# EAGLE board breakout_rfm12b (EAGLE 5.11)
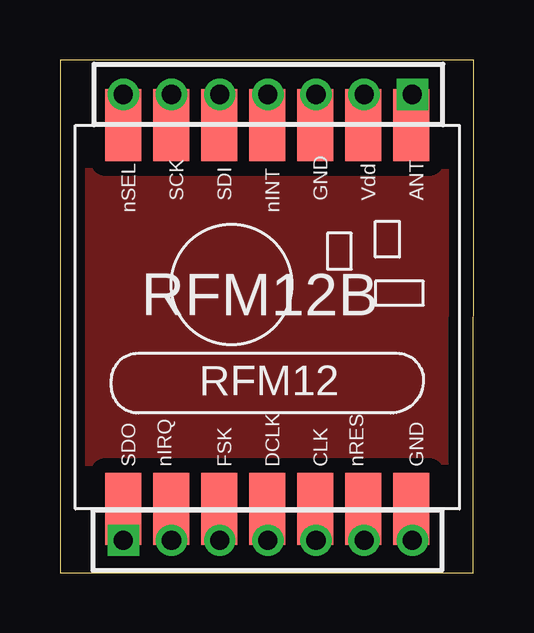
[diagram p0: board, top side]
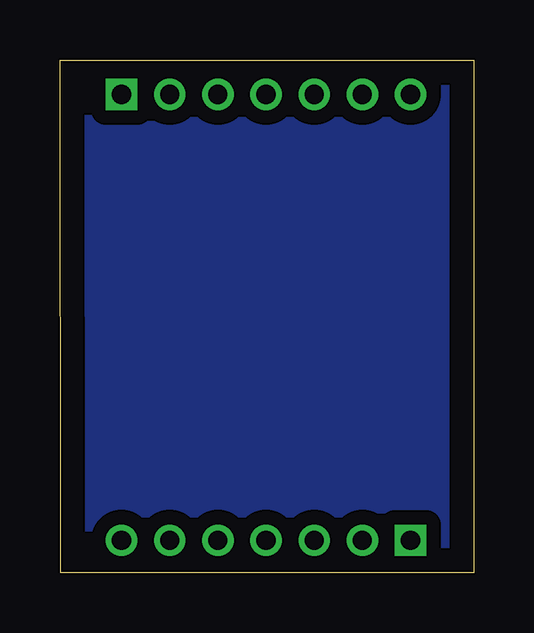
[diagram p1: board, bottom side, seen from below]

Size 17.25 x 21.38 mm. Coordinates in mm from the lower left corner, seen from the top.
Outline: 0,0 17.22,0 17.25,21.38 0,21.38 0,0
Copper layers (1*16): Top 0.035mm / dielectric 1.5mm / Bottom 0.035mm
Design rules "default": minimum track width 10mil, minimum drill 24mil, track to track 8mil, track to pad 8mil, pad to pad 8mil, via to via 8mil, smd to smd 8mil, copper to edge 40mil, drill to drill 8mil, minimum pad ring 10mil, minimum via ring 8mil, stop-mask expansion 4mil, vias tented up to drill 0mil, thermal gap 10mil
Net classes: 1 power: width 0.381 mm, clearance 0.254 mm

## Footprints (pad centres in the part's own frame; a part is rotated, then mirrored left to right if it is on the bottom)
1X07 = drill 0.8 square: 1 0,0 | drill 0.8 round: 2 2.007,0; 3 4.013,0; 4 6.02,0; 5 8.026,0; 6 10.033,0; 7 12.04,0
RFM12 = smd 1.5 x 3: 1 -5,-10; 2 -3,-10; 3 -1,-10; 4 1,-10; 5 3,-10; 6 5,-10; 7 7,-10; 8 7,6; 9 5,6; 10 3,6; 11 1,6; 12 -1,6; 13 -3,6; 14 -5,6

## Placement (x,y rotation side)
LEFT  [1X07]  14.68,19.94 180 top
RIGHT  [1X07]  2.64,1.35 0 top
U$1  RFM12_SMDSMD  [RFM12]  7.65,12.65 0 top

## Library data of the parts
LEFT RIGHT = M7_02mm
U$1 = rfm_12

## Nets
N$2: LEFT.7 U$1.14
N$3: LEFT.6 U$1.13
N$4: LEFT.5 U$1.12
N$5: LEFT.3 U$1.10
N$6: LEFT.1 U$1.8
N$7: RIGHT.1 U$1.1
N$8: RIGHT.2 U$1.2
N$9: RIGHT.7 U$1.7
N$10: LEFT.4 U$1.11
N$11: RIGHT.6 U$1.6
N$12: RIGHT.5 U$1.5
N$13: RIGHT.4 U$1.4
N$14: RIGHT.3 U$1.3
VDD: LEFT.2 U$1.9

## Tracks (layer width: path | path; a pad name or v marks a point on that pad's centre or on a via)
GND
  pour Bottom (isolate 0.61): 0.03,21.39 17.22,21.39 17.22,0.03 0,0.03 0,21.39
  pour Top (isolate 0.61): 0.05,21.34 17.25,21.34 17.25,0 0,0 0,21.39
N$2
  Top 0.813: U$1.14 2.62,18.65 LEFT.7
N$3
  Top 0.813: U$1.13 4.62,18.65 LEFT.6
N$4
  Top 0.813: U$1.12 6.63,18.65 LEFT.5
N$5
  Top 0.813: U$1.10 LEFT.3
N$6
  Top 0.813: U$1.8 LEFT.1
N$7
  Top 0.813: U$1.1 RIGHT.1
N$8
  Top 0.813: U$1.2 RIGHT.2
N$9
  Top 0.813: U$1.7 14.68,2.65 RIGHT.7
N$10
  Top 0.813: U$1.11 8.64,18.65 LEFT.4
N$11
  Top 0.813: U$1.6 12.68,2.65 RIGHT.6
N$12
  Top 0.813: U$1.5 10.67,2.65 RIGHT.5
N$13
  Top 0.813: U$1.4 RIGHT.4
N$14
  Top 0.813: U$1.3 RIGHT.3
VDD
  Top 0.813: U$1.9 LEFT.2

## Text on the board
tNames: RFM12B